# Altium PCB MetroBand 1.1 with changes - PCB1.PcbDoc
Units mm, origin at the board's own origin, x right, y up, seen from the top; angles counter-clockwise.
Board outline 38.5 x 42.5 mm, 2 copper layers (Top Layer, Bottom Layer); 50 components, 40 nets, 177 pads, 23 vias.
Unrouted connection lines stored in the file: 1.
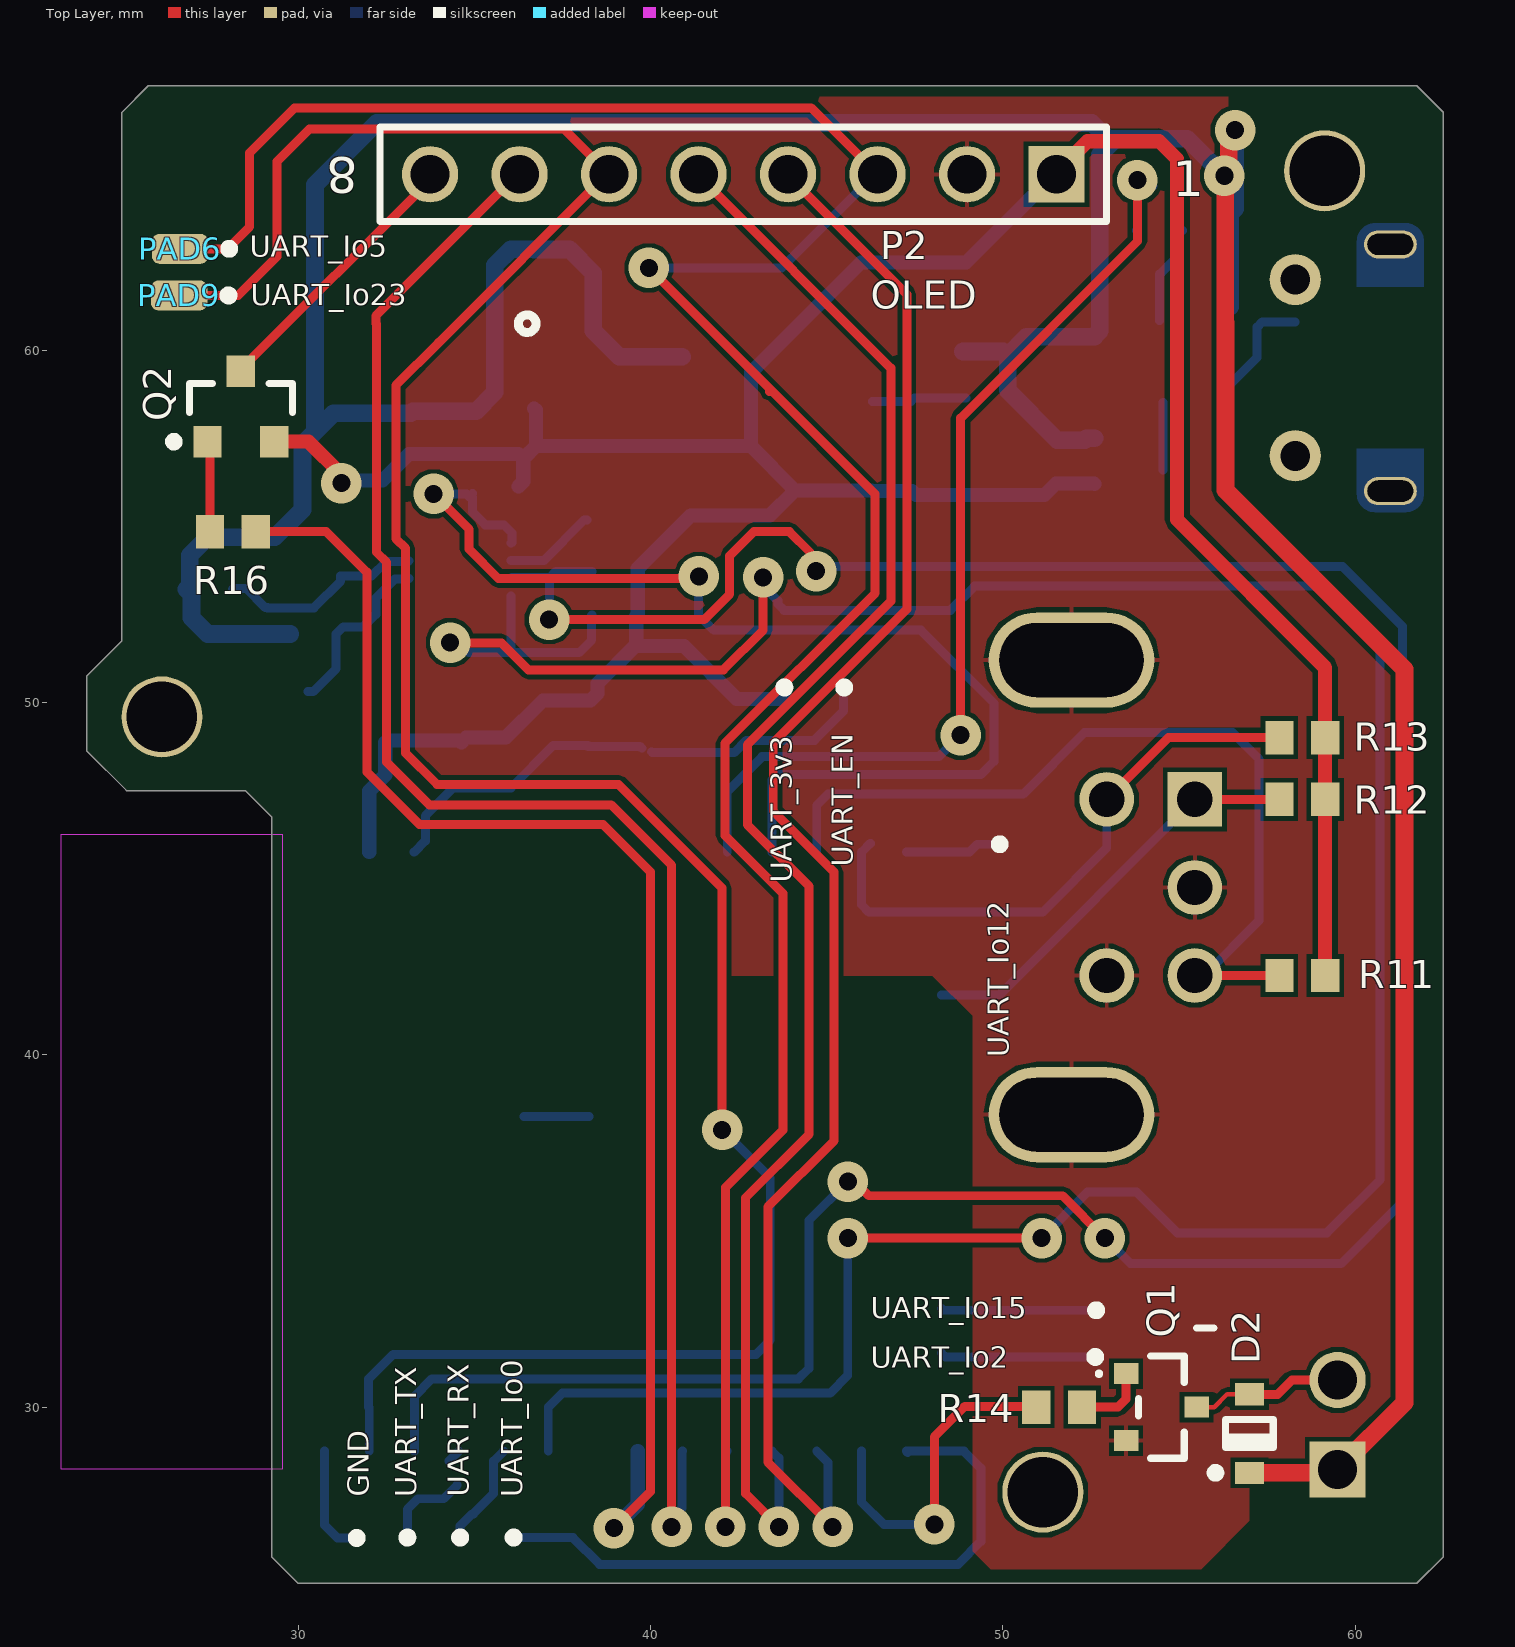
[diagram p0: Top Layer view]
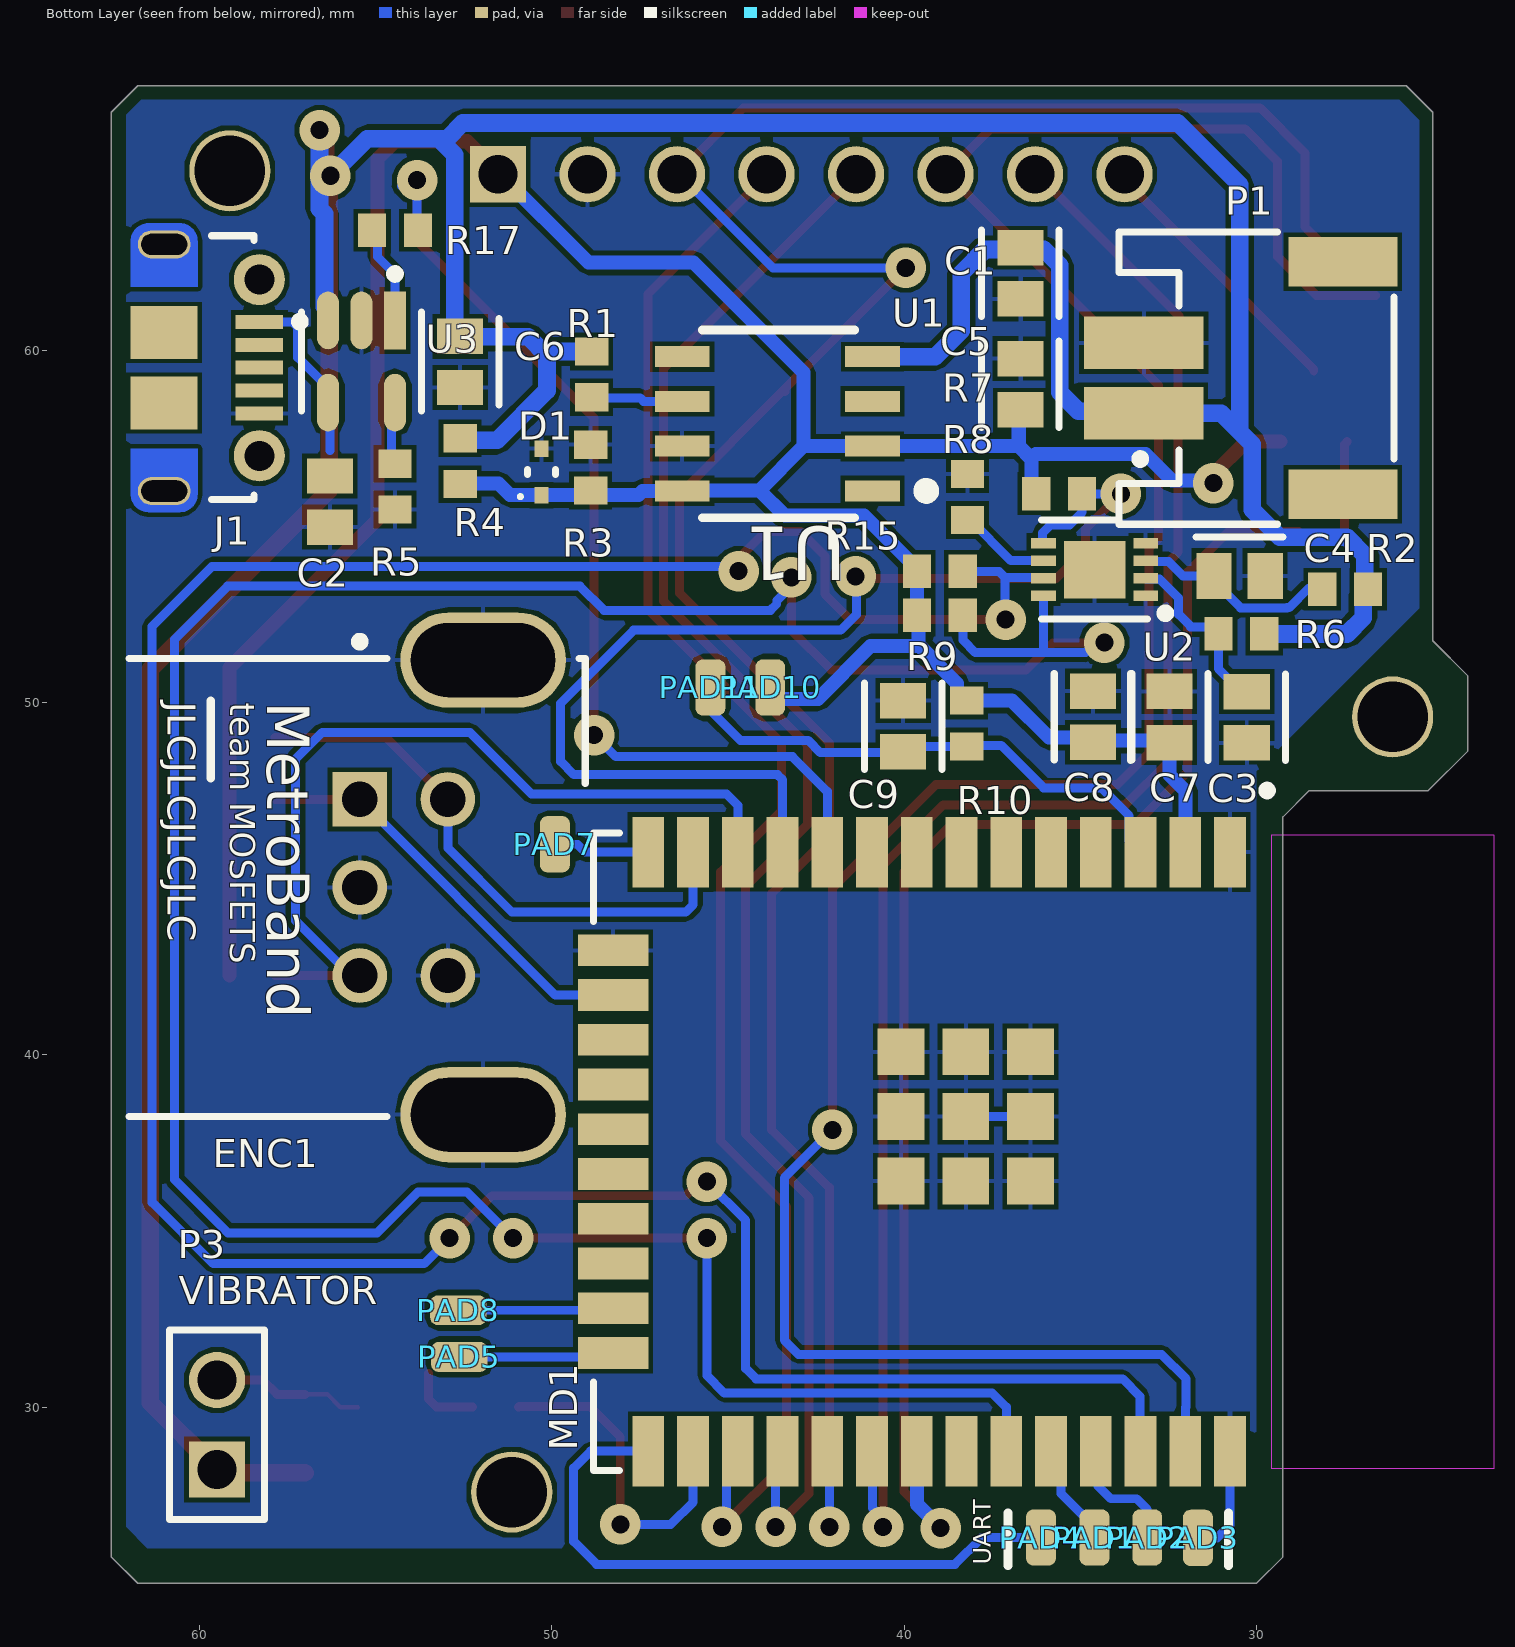
[diagram p1: Bottom Layer view, seen from below]
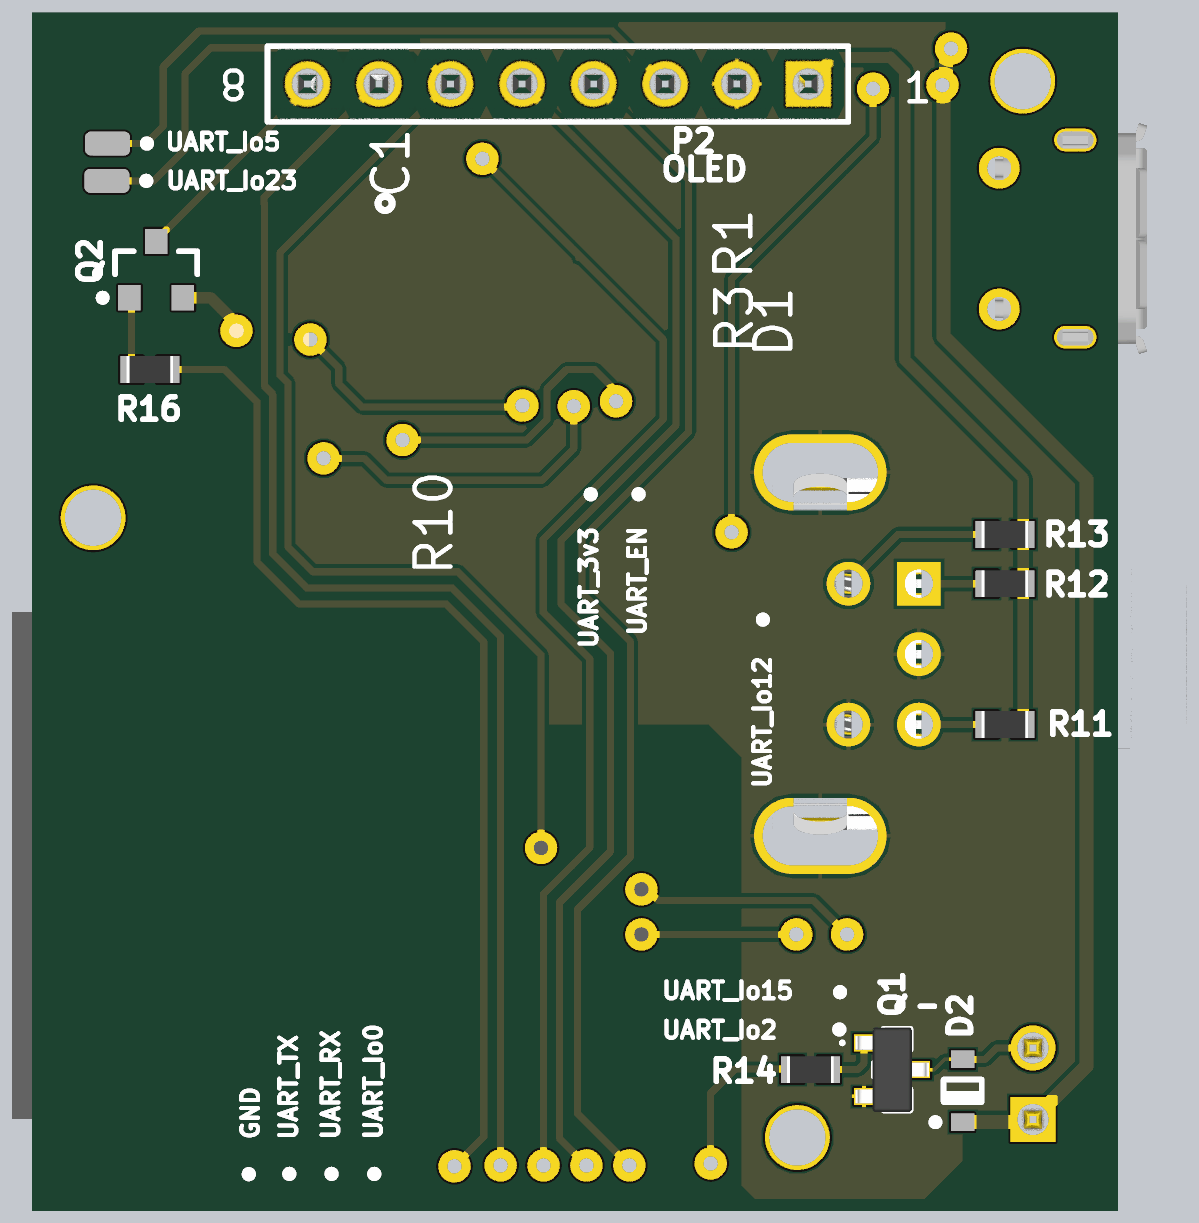
[diagram p2: 3D render of the assembled board from above, using the file's embedded part models]
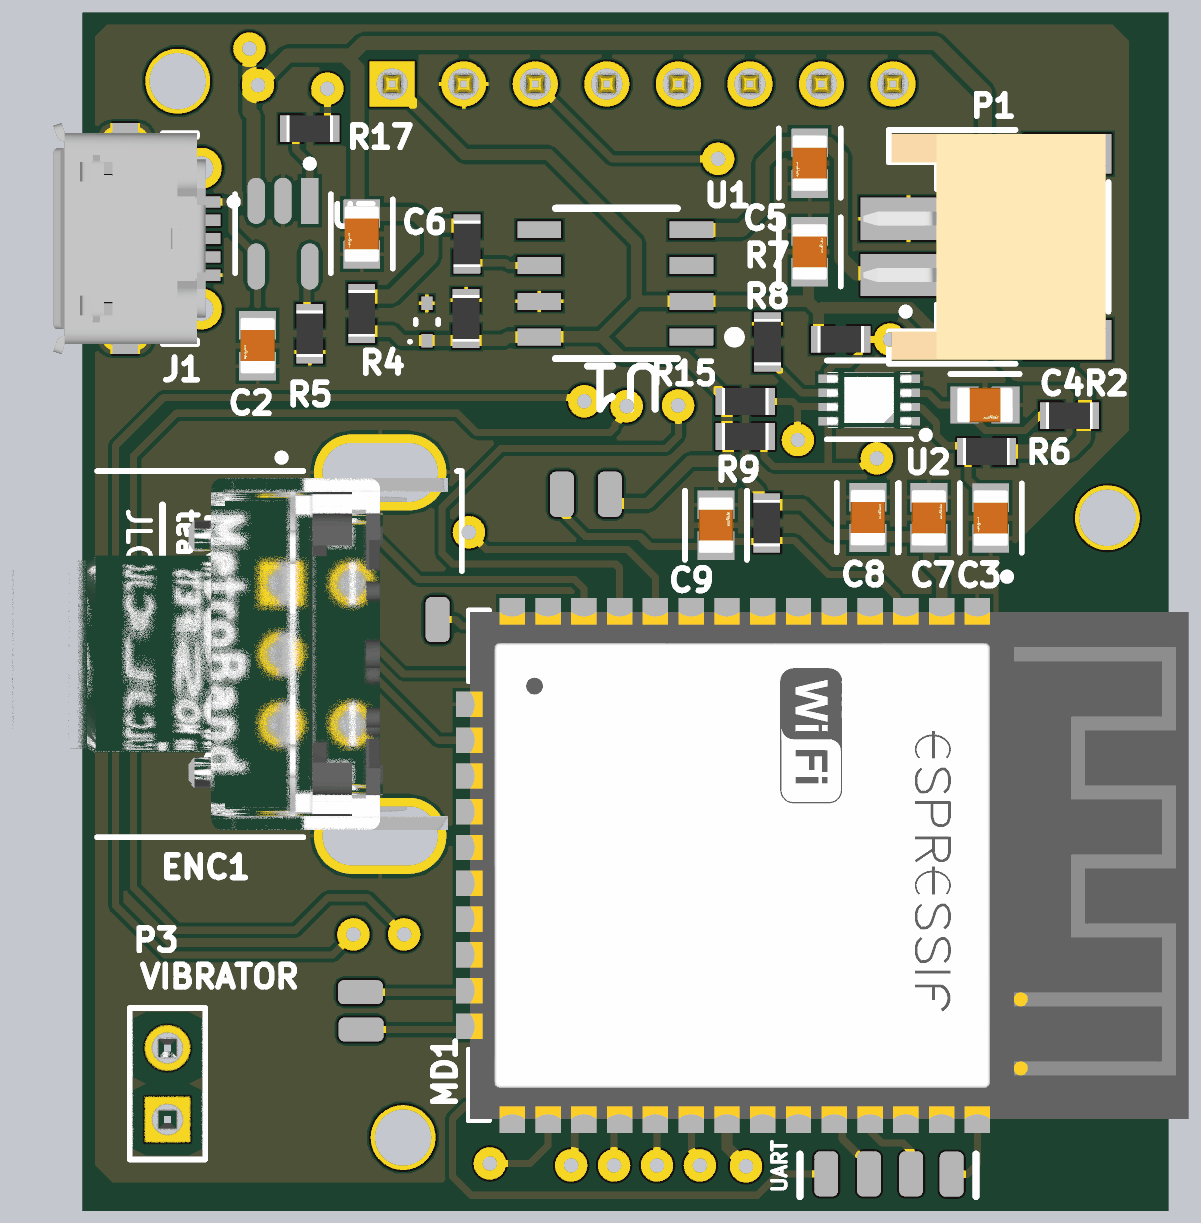
[diagram p3: 3D render of the assembled board from below, using the file's embedded part models]

## Layer stack, top to bottom
Top Solder: solder mask 0.0102, Solder Resist, Dk 3.5
Top Layer: signal copper 0.0356
Dielectric 1: dielectric 0.32, FR-4, Dk 4.8
Bottom Layer: signal copper 0.0356
Bottom Solder: solder mask 0.0102, Solder Resist, Dk 3.5

## Board outline
24,50.75 25,51.75 25,66.75 25.75,67.5 61.75,67.5 62.5,66.75 62.5,25.75 61.75,25 30,25 29.25,25.75 29.25,46.75 28.5,47.498 25.127,47.498 24,48.625

## Design rules (kind name [scope] priority, off if disabled: settings)
BoardOutlineClearance [All] p1: gap=0.2 ignorepadtopadclearanceinfootprint=FALSE
Clearance [All] p1: gap=0.127 ignorepadtopadclearanceinfootprint=FALSE except(0.25: Arc-Hole Track-Hole SMDPad-Hole THPad-Hole Via-Hole Fill-Hole Poly-Hole Region-Hole Text-Hole)
ComponentClearance [All] p1: gap=0.127 collisioncheckmode=3 verticalgap=0.127 showdistances=TRUE
DiffPairsRouting [All] p1: maxlimit=0.254 minlimit=0.127 mostfreqgap=0.127 toplayer_minwidth=0.127 toplayer_maxwidth=25.4 toplayer_prefwidth=0.127 bottomlayer_minwidth=0.127 bottomlayer_maxwidth=25.4 bottomlayer_prefwidth=0.127 maxuncoupledlength=12.7
Height [All] p1: minheight=0 maxheight=1816.048 prefheight=12.7
HoleSize [All] p1: absolutevalues=TRUE maxlimit=6.3 minlimit=0.3 maxpercent=80.000 minpercent=20.000
HoleToHoleClearance [All] p1: gap=0.25 allowstackedmicrovias=FALSE
MinimumAnnularRing [All] p1: minimumring=0.076
MinimumSolderMaskSliver [All] p1: minsoldermaskwidth=0
PlaneClearance [All] p1: clearance=0.127
PlaneConnect PlaneConnectPowerPads [InPadClass('PowerPads')] p1: planeconnectstyle=Direct reliefexpansion=0.508 reliefentries=4 reliefconductorwidth=0.254 reliefairgap=0.254
PlaneConnect [All] p2: pad.planeconnectstyle=Relief pad.reliefexpansion=0.3 pad.reliefentries=4 pad.reliefconductorwidth=0.127 pad.reliefairgap=0.127 via.planeconnectstyle=Direct via.reliefexpansion=0.3 via.reliefentries=4 via.reliefconductorwidth=0.127 via.reliefairgap=0.127
PolygonConnect PolygonConnectPowerPads [All vs (InPadClass('PowerPads'))] p1: connectstyle=Direct reliefconductorwidth=0.254 reliefentries=4 polygonreliefangle="90 Angle" airgapwidth=0.254
PolygonConnect [All] p2: thpad.connectstyle=Relief thpad.reliefconductorwidth=0.127 thpad.reliefentries=4 thpad.polygonreliefangle="90 Angle" thpad.airgapwidth=0.127 smdpad.connectstyle=Relief smdpad.reliefconductorwidth=0.127 smdpad.reliefentries=4 smdpad.polygonreliefangle="90 Angle" smdpad.airgapwidth=0.127 via.connectstyle=Direct via.reliefconductorwidth=0.127 via.reliefentries=4 via.polygonreliefangle="90 Angle" via.airgapwidth=0.127
RoutingVias [All] p1: holewidth=0.3 width=0.6 viastyle="Through Hole" minholewidth=0.3 minwidth=0.6 maxholewidth=0.6 maxwidth=6.6
SilkToSilkClearance [All] p1: silktosilkclearance=0
SilkToSolderMaskClearance [IsPad] p1: minsilkscreentomaskgap=0.127 clearancetoexposedcopper=TRUE
SolderMaskExpansion [All] p1: expansion=0.075 istentingtop=FALSE
Width [All] p1: maxlimit=25.4 minlimit=0.127 preferedwidth=0.127 minimp=50.000000 maximp=50.000000 favimp=50.000000
20 further rules are at their usual default settings.

## Classes and differential pairs
component class "Metroband 1.1 with changes - Sheet1": Q2 R16 R17

## Components (designator, comment, footprint, x,y, rotation, side; value= is the part's Value field where it differs from the comment)
C1 "1uF" FP-GRM21B-0_15-IPC_C 36.703,62.179 r270 bottom
C2 "4.7uF" FP-GRM21B-0_15-IPC_C 56.3,55.7 r270 bottom
C3 "1uF" FP-GRM21B-0_15-IPC_C 30.277,49.581 r270 bottom
C4 "10nF" FP-GRM21B-0_15-IPC_C 30.48,53.594 r180 bottom
C5 "1uF" FP-GRM21B-0_15-IPC_C 36.703,59.03 r90 bottom
C6 "4.7uF" FP-GRM21B-0_15-IPC_C 52.603,59.665 r270 bottom
C7 "10uF" FP-GRM21B-0_15-IPC_C 32.474,49.588 r90 bottom
C8 "100nF" FP-GRM21B-0_15-IPC_C 34.64,49.596 r90 bottom
C9 "1uF" FP-GRM21B-0_15-IPC_C 40.03,49.327 r90 bottom
D1 "MM5Z3V3T1G" ONSC-SOD-523-2-502-01_V 50.292,56.54 r90 bottom
D2 "BAT54HT1G" ONSC-SOD-323-2-477-02_V 57,29.25 r90 top
ENC1 "PEC12R-2120F-S0012" FP-PEC12R-2120F-S0012-MFG 60.75,44.75 r270 bottom
J1 "105017-0001" USB-MICRO-B_V 59.65,59.5 r270 bottom
MD1 "ESP32-WROOM-32D" FP-ESP32-WROOM-32D-MFG 36.01,37.25 r270 bottom
P1 "620102131822" 620102131822 29.997,59.207 r90 bottom
P2 "61300811121" 61300811121 42.635,64.989 r180 top
P3 "61300211121" 61300211121 59.5,29.5 r90 bottom
PAD1 "RX" PAD-Footprint-1#1 34.4,26.3 r180 bottom
PAD2 "TX" PAD-Footprint-1#2 33.782,26.289 r180 bottom
PAD3 "GND" PAD-Footprint-1#3 31.663,26.289 r180 bottom
PAD4 "IO0" PAD-Footprint-1#4 37.9,22.6 r90 top
PAD5 "IO2" PAD-Footprint-1#3 52.625,31.425 r90 bottom
PAD6 "IO5" PAD-Footprint-1#3 26.65,62.875 r90 top
PAD7 "IO12" PAD-Footprint-1#3 49.913,45.975 r0 bottom
PAD8 "IO15" PAD-Footprint-1#3 52.65,32.75 r90 bottom
PAD9 "IO23" PAD-Footprint-1#3 26.625,61.55 r90 top
PAD10 "3V3" PAD-Footprint-1#3 43.8,50.425 r180 bottom
PAD11 "EN" PAD-Footprint-1#3 45.5,50.425 r180 bottom
Q1 "BC847B215" NXP-SOT23-3_V 54.5,30 r0 top
Q2 "MMBT4403LT1G" ONSC-SOT-23-3-318-08_V 28.375,58.4 r90 top
R1 "100K" RESC1609X50X30NL8T20 48.87,59.309 r90 bottom
R2 "100" RESC1609X50X30NL8T20 27.483,53.213 r180 bottom
R3 "1K" RESC1609X50X30NL8T20 48.9,56.666 r270 bottom
R4 "3.3" RESC1609X50X30NL8T20 52.603,56.845 r270 bottom
R5 "2K" RESC1609X50X30NL8T20 54.45,56.125 r90 bottom
R6 "1K" RESC1609X50X30NL8T20 30.429,51.943 r180 bottom
R7 "2.2K" RESC1609X50X30NL8T20 38.202,55.829 r270 bottom
R8 "2.2K" RESC1609X50X30NL8T20 35.6,55.925 r0 bottom
R9 "2.2K" RESC1609X50X30NL8T20 38.989,52.476 r0 bottom
R10 "10K" RESC1609X50X30NL8T20 38.227,49.403 r90 bottom
R11 "2.2K" RESC1609X50X30NL8T20 58.5,42.25 r0 top
R12 "2.2K" RESC1609X50X30NL8T20 58.5,47.25 r0 top
R13 "2.2K" RESC1609X50X30NL8T20 58.5,49 r0 top
R14 "1K" RESC1609X50X30NL8T20 51.6,30 r180 top
R15 "2.2K" RESC1609X50X30NL8T20 38.989,53.721 r0 bottom
R16 "1K" RESC1609X50X30NL8T20 28.15,54.85 r0 top
R17 "470" RESC1609X50X30NL8T20 54.45,63.4 r180 bottom
U1 "AP7217A-33SPG-13" AP7217A-33SPG-13-Footprint-1 40.898,56.003 r90 bottom
U2 "MAX17043G+T" FP-T823-1-MFG 34.595,53.772 r0 bottom
U3 "MCP73831T-2ACI/OT" FP-C04-091-OT-IPC_A 55.4,59.675 r270 bottom

## Footprints (in the part's own frame and the unit in brackets; to place one, negate y for a bottom-side part, rotate by r counter-clockwise, add the part's x,y. Pads: shape width x height; smd on the part's side, far side on the other; paste and mask are expansions set on the pad)
61300211121 [mm] "Pin Header, pitch 2.54 mm, THT, Vertical, single row, 2p"
  rect 1.6x1.6 hole 1.1: 1(-1.27,0)
  round 1.6 hole 1.1: 2(1.27,0)
  silkscreen extent -2.69,-1.35 2.69,1.35, body extent -2.54,-1.27 2.54,1.27, height 8.57
61300811121 [mm] "Pin Header, pitch 2.54 mm, THT, Vertical, single row, 8p"
  rect 1.6x1.6 hole 1.1: 1(-8.89,0)
  round 1.6 hole 1.1: 2(-6.35,0) 3(-3.81,0) 4(-1.27,0) 5(1.27,0) 6(3.81,0) 7(6.35,0) 8(8.89,0)
  silkscreen extent -10.31,-1.35 10.31,1.35, body extent -10.16,-1.27 10.16,1.27, height 8.57
620102131822 [mm] "2.00mm SMT Male Horizontal Shrouded Header, 2p"
  rect 1.5x3.4 smd: 1(-1,3.2) 2(1,3.2)
  rect 1.4x3.1 smd: MP1(-3.3,-2.45) MP2(3.3,-2.45)
  silkscreen extent -4.15,-3.9 4.15,3.9, body extent -4,-3.8 4,4.8, height 5.57
AP7217A-33SPG-13-Footprint-1 [mm]
  rect 0.6x1.55 smd: 1(0,0) 2(1.27,0) 3(2.54,0) 4(3.81,0) 5(3.81,5.4) 6(2.54,5.4) 7(1.27,5.4) 8(0,5.4)
  silkscreen extent -0.76,-1.76 4.57,4.83
FP-C04-091-OT-IPC_A [mil]
  rect 64.5x24.33 smd paste+0 mask+0: 1(-45.91,37.4)
  rrect100% 64.5x24.33 smd paste+0 mask+0: 2(-45.91,0) 3(-45.91,-37.4) 4(45.91,-37.4) 5(45.91,37.4)
  silkscreen extent -103,-67 55,67
FP-ESP32-WROOM-32D-MFG [mm]
  rect 2x0.9 smd paste+0 mask+0: 1(-8.5,5.26) 2(-8.5,3.99) 3(-8.5,2.72) 4(-8.5,1.45) 5(-8.5,0.18) 6(-8.5,-1.09) 7(-8.5,-2.36) 8(-8.5,-3.63) 9(-8.5,-4.9) 10(-8.5,-6.17) 11(-8.5,-7.44) 12(-8.5,-8.71) 13(-8.5,-9.98) 14(-8.5,-11.25) 25(8.5,-11.25) 26(8.5,-9.98) 27(8.5,-8.71) 28(8.5,-7.44) 29(8.5,-6.17) 30(8.5,-4.9) 31(8.5,-3.63) 32(8.5,-2.36) 33(8.5,-1.09) 34(8.5,0.18) 35(8.5,1.45) 36(8.5,2.72) 37(8.5,3.99) 38(8.5,5.26)
  rect 0.9x2 smd paste+0 mask+0: 15(-5.715,-12.25) 16(-4.445,-12.25) 17(-3.175,-12.25) 18(-1.905,-12.25) 19(-0.635,-12.25) 20(0.635,-12.25) 21(1.905,-12.25) 22(3.175,-12.25) 23(4.445,-12.25) 24(5.715,-12.25)
  rect 1.33x1.33 smd paste+0 mask+0: 39(-2.835,-4.075) 39(-2.835,-2.24) 39(-2.835,-0.405) 39(-1,-4.075) 39(-1,-2.24) 39(-1,-0.405) 39(0.835,-4.075) 39(0.835,-2.24) 39(0.835,-0.405)
  Keep-Out Layer region: -9,12.75 9,12.75 9,6.45 -9,6.45
  Keep-Out Layer region: -9,12.75 9,12.75 9,6.45 -9,6.45
  silkscreen extent -10.37,-12.8 9.05,6.43, body extent -9,-12.75 9,12.75, height 3.2
FP-GRM21B-0_15-IPC_C [mm]
  rect 1.006x1.308 smd paste+0 mask+0: 1(-0.726,0) 2(0.726,0)
  silkscreen extent -1.23,-1.1 1.23,1.1, body extent -1,-0.63 1,0.63, height 1.4
FP-PEC12R-2120F-S0012-MFG [mm]
  round 1.55 hole 1 paste-1000 mask+0: 1(-2.5,7.8) 2(2.5,7.8) B(2.5,5.3) C(0,5.3)
  rrect100% 2.7x4.7 hole 2.1 slot 4.1 at 90 deg paste-1000 mask+0: 3(-6.45,8.8) 4(6.45,8.8)
  rect 1.55x1.55 hole 1 paste-1000 mask+0: A(-2.5,5.3)
  silkscreen extent -7.1,-1.25 6.5,11.7, body extent -6.41,-11.2 6.41,11.2, height 17.2
FP-T823-1-MFG [mm]
  rect 0.7x0.3 smd paste+0 mask+0: 1(-1.45,0.75) 2(-1.45,0.25) 3(-1.45,-0.25) 4(-1.45,-0.75) 5(1.45,-0.75) 6(1.45,-0.25) 7(1.45,0.25) 8(1.45,0.75)
  rect 1.75x1.63 smd paste+0 mask+0: 9(0,0)
  silkscreen extent -2.13,-1.4 1.5,1.4, body extent -1.5,-1 1.5,1, height 0.8
NXP-SOT23-3_V [mm] "SOT23, 3-Leads, Body 2.9x1.3mm, Pitch 0.95mm"
  rect 0.7x0.6 smd paste-0.05: 1(-1,0.95) 2(-1,-0.95) 3(1,0)
  silkscreen extent -1.79,-1.45 0.65,1.45, body extent -1.3,-1.5 1.3,1.5, height 1.1
ONSC-SOD-323-2-477-02_V [mm] "SOD, 2-Leads, Body 1.7x1.25mm"
  rect 0.63x0.83 smd: 1(-1.115,0) 2(1.115,0)
  silkscreen extent -1.24,-0.67 0.4,1.09, body extent -0.85,-0.63 0.85,0.63, height 1.06
ONSC-SOD-523-2-502-01_V [mm] "SOD, 2-Leads, Body 1.2x0.8mm"
  rect 0.48x0.4 smd: 1(-0.66,0) 2(0.66,0)
  silkscreen extent -0.75,-0.4 0.07,0.65, body extent -0.6,-0.4 0.6,0.4, height 0.7
ONSC-SOT-23-3-318-08_V [mm] "SOT23, 3-Leads, Body 2.92x1.3mm, Pitch 0.95mm"
  rect 0.9x0.8 smd: 1(-1,0.95) 2(-1,-0.95) 3(1,0)
  silkscreen extent -1.12,-1.46 0.65,2.02, body extent -0.65,-1.46 0.65,1.46, height 1.11
PAD-Footprint-1#1 [mm]
  rrect50% 0.85x1.6 smd: 1(-0.2,0)
PAD-Footprint-1#2 [mm]
  rrect50% 0.85x1.6 smd: 1(0.682,0.011)
PAD-Footprint-1#3 [mm]
  rrect50% 0.85x1.6 smd: 1(0,0)
PAD-Footprint-1#4 [mm]
  rrect50% 1.6x0.85 smd far side: 1(3.7,1.784)
RESC1609X50X30NL8T20 [mm] "Chip Resistor, 2-Leads, Body 1.65x0.95mm, IPC Medium Density"
  rect 0.8x0.95 smd: 1(-0.65,0) 2(0.65,0)
  body extent -0.82,-0.48 0.82,0.48, height 0.5
USB-MICRO-B_V [mm] "USB, MICRO B, Body 7.491x4.695 mm, Pitch 0.65 mm"
  rect 0.4x1.35 smd: 1(-1.3,1.35) 2(-0.65,1.35) 3(0,1.35) 4(0.65,1.35) 5(1.3,1.35)
  round 1.45 hole 0.85: 6(-2.5,1.35) 7(2.5,1.35)
  oval 0.8x1.5 hole 0.6 slot 1.3 at 90 deg: 8(-3.5,-1.35) 11(3.5,-1.35)
  rect 1.5x1.9 smd: 9(-1,-1.35) 10(1,-1.35)
  Top Layer circle w0.5: c-3.6,-1.8 r0.25
  Top Layer circle w0.5: c-3.6,-0.9 r0.25
  Top Layer circle w0.5: c3.6,-1.8 r0.25
  Top Layer circle w0.5: c3.6,-0.9 r0.25
  Top Layer region: -3.6,-1.8 -3.6,-0.9 -4.1,-0.9 -4.1,-1.8
  Top Layer region: 3.6,-0.9 3.6,-1.8 4.1,-1.8 4.1,-0.9
  Top Layer region: 2.3,-0.4 2.3,-2.3 3.6,-2.3 3.6,-0.4
  Top Layer region: -2.3,-2.3 -2.3,-0.4 -3.6,-0.4 -3.6,-2.3
  silkscreen extent -3.75,-0.01 3.75,2.62, body extent -4.1,-3.9 4.1,1.5, height 2.67

## Part data
C1 C5: library part CMP-2007-03541-2, "Chip Multilayer Ceramic Capacitors for General Purpose, 0805, 1uF, X5R, 15%, 10%, 25V", Case Code (Imperial)=0805, Case Code (Metric)=2012, Dielectric=X5R, Max Operating Temperature=85°C, Min Operating Temperature=-55°C, Package Quantity=1, Tolerance=10%, Voltage=25V, Capacitance=1uF, Case/Package=0805, Depth=1.25mm, Height=1.25mm, Lead Free="Lead Free", Length=2mm, Material=Ceramic, Mount="Surface Mount", Packaging="Tape and Reel", Radiation Hardening=No, Termination=SMD/SMT, Thickness=0.053inch, Voltage Rating=25V, Voltage Rating (DC)=25V, Width=0.049inch
C2 C6: library part CMP-2007-03541-2, "Chip Multilayer Ceramic Capacitors for General Purpose, 0805, 4.7uF, X5R, 15%, 10%, 25V", Capacitance=10uF, Case Code (Imperial)=0805, Case Code (Metric)=2012, Dielectric=X5R, Max Operating Temperature=85°C, Min Operating Temperature=-55°C, Package Quantity=1, Tolerance=10%, Voltage=25V, Case/Package=0805, Depth=1.25mm, Height=1.25mm, Lead Free="Lead Free", Length=2mm, Material=Ceramic, Mount="Surface Mount", Packaging="Tape and Reel", Radiation Hardening=No, Termination=SMD/SMT, Thickness=0.053inch, Voltage Rating=25V, Voltage Rating (DC)=25V, Width=0.049inch
C3 C9: library part CMP-2007-03541-2, "Chip Multilayer Ceramic Capacitors for General Purpose, 0805, 1uF, X5R, 15%, 10%, 25V", Capacitance=10uF, Case Code (Imperial)=0805, Case Code (Metric)=2012, Dielectric=X5R, Max Operating Temperature=85°C, Min Operating Temperature=-55°C, Package Quantity=1, Tolerance=10%, Voltage=25V, Case/Package=0805, Depth=1.25mm, Height=1.25mm, Lead Free="Lead Free", Length=2mm, Material=Ceramic, Mount="Surface Mount", Packaging="Tape and Reel", Radiation Hardening=No, Termination=SMD/SMT, Thickness=0.053inch, Voltage Rating=25V, Voltage Rating (DC)=25V, Width=0.049inch
C4: library part CMP-2007-03541-2, "Chip Multilayer Ceramic Capacitors for General Purpose, 0805, 10nF, X5R, 15%, 10%, 25V", Capacitance=10uF, Case Code (Imperial)=0805, Case Code (Metric)=2012, Dielectric=X5R, Max Operating Temperature=85°C, Min Operating Temperature=-55°C, Package Quantity=1, Tolerance=10%, Voltage=25V, Case/Package=0805, Depth=1.25mm, Height=1.25mm, Lead Free="Lead Free", Length=2mm, Material=Ceramic, Mount="Surface Mount", Packaging="Tape and Reel", Radiation Hardening=No, Termination=SMD/SMT, Thickness=0.053inch, Voltage Rating=25V, Voltage Rating (DC)=25V, Width=0.049inch
C7: library part CMP-2007-03541-2, "Chip Multilayer Ceramic Capacitors for General Purpose, 0805, 10uF, X5R, 15%, 10%, 25V", Case Code (Imperial)=0805, Case Code (Metric)=2012, Dielectric=X5R, Max Operating Temperature=85°C, Min Operating Temperature=-55°C, Package Quantity=1, Tolerance=10%, Voltage=25V, Capacitance=10uF, Case/Package=0805, Depth=1.25mm, Height=1.25mm, Lead Free="Lead Free", Length=2mm, Material=Ceramic, Mount="Surface Mount", Packaging="Tape and Reel", Radiation Hardening=No, Termination=SMD/SMT, Thickness=0.053inch, Voltage Rating=25V, Voltage Rating (DC)=25V, Width=0.049inch
C8: library part CMP-2007-03541-2, "Chip Multilayer Ceramic Capacitors for General Purpose, 0805, 100nF, X5R, 15%, 10%, 25V", Capacitance=10uF, Case Code (Imperial)=0805, Case Code (Metric)=2012, Dielectric=X5R, Max Operating Temperature=85°C, Min Operating Temperature=-55°C, Package Quantity=1, Tolerance=10%, Voltage=25V, Case/Package=0805, Depth=1.25mm, Height=1.25mm, Lead Free="Lead Free", Length=2mm, Material=Ceramic, Mount="Surface Mount", Packaging="Tape and Reel", Radiation Hardening=No, Termination=SMD/SMT, Thickness=0.053inch, Voltage Rating=25V, Voltage Rating (DC)=25V, Width=0.049inch
D1: library part CMP-1060-00750-1, "Zener Voltage Regulator, 500 mW, 2-Pin SOD-523, Pb-Free, Tape and Reel", Manufacturer="On Semiconductor", ComponentLink1Description="Manufacturer URL", ComponentLink1URL=http://www.onsemi.com/, ComponentLink2Description=Datasheet, ComponentLink2URL=http://www.onsemi.cn/pub_link/Collateral/MM5Z2V4T1-D.PDF, ComponentLink3Description="Package Specification", ComponentLink3URL=http://www.onsemi.com/pub_link/Collateral/502-01.PDF, DatasheetVersion="Rev. 10", Mounting Technology="Surface Mount", P Max (W)=0.5, PackageDescription="2-Pin SOD, Body 1.2 x 0.8 mm", PackageReference=SOD-523-2-502-01, PackageVersion="Rev. E, 09/2010", Packing="Tape and Reel", PartNumber=MM5Z3V3T1G, RoHS=Pb-Free, VZ Typ (V)=3.3
D2: library part CMP-1055-00462-1, "Schottky Barrier Diode, 2-Pin SOD-323, Pb-Free, Tape and Reel", Manufacturer="On Semiconductor", ComponentLink1Description="Manufacturer URL", ComponentLink1URL=http://www.onsemi.com/, ComponentLink2Description=Datasheet, ComponentLink2URL=http://www.onsemi.cn/pub_link/Collateral/BAT54HT1-D.PDF, ComponentLink3Description="Package Specification", ComponentLink3URL=http://www.onsemi.com/pub_link/Collateral/477-02.PDF.1, Configuration=Single, DatasheetVersion="Rev. 6", IFSM Max (A)=0.6, Mounting Technology="Surface Mount", PackageDescription="2-Pin SOD, Body 1.7 x 1.25 mm", PackageReference=SOD-323-2-477-02, PackageVersion="Rev. H, 03/2007", Packing="Tape and Reel", PartNumber=BAT54HT1G, RoHS=TRUE, trr Max (ns)=5
ENC1: library part CMP-07421-000025-1, "ROTARY ENCODER MECHANICAL 12PPR", Max Operating Temperature=70°C, Min Operating Temperature=-30°C, Package Quantity=75, Built in Switch=Yes, Detent=Yes, Encoder Type=Mechanical, Height=13.4mm, Hole Diameter=2.1mm, Length=26mm, Mount="Through Hole", Number of Channels=2, Orientation="Right Angle", Output Type=Quadrature, Packaging=Bulk, Pulses per Revolution=12, RoHS Compliant=Yes, Series=PEC12R, Termination="PC Pin", Width=12.5mm
J1: library part CMP-2000-05827-1, "Micro-USB B Receptacle, Right Angle, Bottom Mount, Surface Mount, with Solder Tabs, -30 to 85 degC, 5-Pin USB, RoHS, Tape and Reel", Manufacturer=Molex, Package Description="5-Leads USB, Micro B, Body 7.5 x 5 mm, Pitch 0.65 mm", Package Reference=MICRO-B, Package Version="Rev. F, 12/2012", Standard Package=1, Voltage - Max=30V, 3D Model=105017-0001.stp, Catalog Drawings=1050170001, Category=Connectors,Interconnects, Circuits=5, Connector Type=USB-microB, Datasheet URL=http://www.molex.com/elqNow/elqRedir.htm?ref=http://www.molex.com/webdocs/datasheets/pdf/en-us/1050170001_IO_CONNECTORS.pdf, Datasheet Version=03/2016, Family=USB,DVI,HDMIConnectors, Featured Product=Micro-USBConnectorsUSBConnectors, Features=Shielded,SolderRetention, Gender=Receptacle, Ingress Protection=-, Manufacturer URL=http://www.molex.com/, Mating Products=WM17145-ND-CABLEMICROUSBBTOSTDA1.0MWM17147-ND-CABLEMICROUSBBTOSTDA2.0MWM17146-ND-CABLEMICROUSBBTOSTDA1.5M, Mounting Technology=SurfaceMount, Mounting Type=BoardCutout,SurfaceMount,RightAngle, Number of Contacts=5, Online Catalog=Molex-MicroUSB, Other Names=WM1399DKR, Package URL=http://www.molex.com/pdm_docs/sd/1050170001_sd.pdf, Packaging=Digi-Reel®, PCN Assembly/Origin=ResinSupplier21/Oct/2015, RoHS Information=1050170001CertofCompliance, Series=-, Specifications=-
MD1: library part CMP-194065-000003-1, "WIFI MODULE 32MBITS SPI FLASH", Manufacturer="Espressif Systems", Max Frequency=2484MHz, Max Supply Voltage=3.6V, Min Supply Voltage=3V, Nominal Supply Current=500mA, Temperature="-40°C to +85°C", Temperature Range High=+85°C, Temperature Range Low=-40°C, Automotive=No, Bandwidth=72MHz, Category=UNK, ComponentLink2Description=Datasheet, ComponentLink2URL=https://www.espressif.com/sites/default/files/documentation/esp32-wroom-32d_esp32-wroom-32u_datasheet_en.pdf, Data Rate=150Mbits/s, Device Class L1="Integrated Circuits (ICs)", Device Class L2="RF Semiconductors and Devices", Device Class L3=Transceivers, Digikey Description="WIFI MODULE 32MBITS SPI FLASH", Height=3.2mm, Interface=I2C,SPI,UART,Ethernet,I2S,Other, Lead Free=Yes, Manufacturer Part Number=ESP32-WROOM-32D, Mouser Description="Wi-Fi/BT BLE Module ESP32-D0WD, SPI Flash, UART, P", Number Of Adc Channels=16, Number Of Gpio=32, Octopart=https://octopart.com/esp32-wroom-32d-espressif+systems-91040050, Package=ESP32-WROOM-32D, RoHS=TRUE, Sensitivity=-98dBm
P1: library part CMP-1502-00669-1, "Male Shrouded Header WR-WTB, SMT, Right Angled, pitch 2 mm, 1 x 2 position", Contact Resistance=20mOhm, Manufacturer="Wurth Elektronik", Operating Temperature=-25to85degC, Working Voltage=100VAC, Datasheet URL=https://katalog.we-online.de/em/datasheet/6201xx131822.pdf, Gender=Male, Manufacturer URL=http://www.we-online.de, Mounting Technology=SMT, Orientation=RightAngled, Package Reference=620102131822, Packaging=TapeandReel, Part Number=620102131822, Pitch=2mm, Position=1x2, Publisher=WurthElektronik
P2: library part CMP-1502-01076-1, "THT Vertical Pin Header WR-PHD, Pitch 2.54 mm, Single Row, 8 pins", Contact Resistance=20mOhm, Manufacturer="Wurth Elektronik", Operating Temperature=-40to105degC, Rated Current=3A, Withstanding Voltage=500VAC, Working Voltage=250VAC, Datasheet URL=https://katalog.we-online.de/em/datasheet/6130xx11121.pdf, Gender=Male, Manufacturer URL=http://www.we-online.de, Mounting Technology=THT, Orientation=Vertical, Package Reference=61300811121, Packaging=Bag, Part Number=61300811121, Pin Number=8, Pitch=2.54mm, Publisher=WurthElektronik, Row Number=Single
P3: library part CMP-1712-00002-4, "THT Vertical Pin Header WR-PHD, Pitch 2.54 mm, Single Row, 2 pins", Contact Resistance=20mOhm, Manufacturer="Wurth Elektronik", Operating Temperature=-40to105degC, Rated Current=3A, Withstanding Voltage=500VAC, Working Voltage=250VAC, Datasheet URL=https://katalog.we-online.de/em/datasheet/6130xx11121.pdf, Gender=Male, Manufacturer URL=http://www.we-online.de, Mounting Technology=THT, Orientation=Vertical, Package Reference=61300211121, Packaging=Bag, Part Number=61300211121, Pin Number=2, Pitch=2.54mm, Publisher=WurthElektronik, Row Number=Single
PAD1 PAD2 PAD3 PAD4 PAD5 PAD6 PAD7 PAD8 PAD9 PAD10 PAD11: library part CMP-00000-3, "Wirepad"
Q1: library part CMP-013-00034-1, "TRANSISTOR, NPN, REEL 3K"
Q2: library part CMP-1048-00539-1, "Switching Transistor, PNP Silicon, 3-Pin SOT-23, Pb-Free, Tape and Reel", Manufacturer="On Semiconductor", ComponentLink1Description="Manufacturer URL", ComponentLink1URL=http://www.onsemi.com/, ComponentLink2Description=Datasheet, ComponentLink2URL=http://www.onsemi.cn/pub_link/Collateral/MMBT4403LT1-D.PDF, ComponentLink3Description="Package Specification", ComponentLink3URL=http://www.onsemi.cn/pub_link/Collateral/318-08.PDF, DatasheetVersion="Rev. 12", fT Min (MHz)=200, IC Continuous (A)=-0.6, Mounting Technology="Surface Mount", PackageDescription="3-Pin Small Outline Transistor, Body 2.92 x 1.3 mm, Pitch 0.95 mm", PackageReference=SOT-23-3-318-08, PackageVersion="Rev. AP, 11/2009", Packing="Tape and Reel", PartNumber=MMBT4403LT1G, Polarity=PNP, RoHS=TRUE
R1: library part CMP-2000-03816-5, "Chip Resistor, 100K Ohm, Jumper, 100 mW, -55 to 155 degC, 0603 (1608 Metric), RoHS, Tape and Reel", Manufacturer="Vishay Semiconductor", Max Operating Temperature="155 degC", Min Operating Temperature="-55 degC", Package Quantity=5000, Voltage Rating="75 V", ComponentLink1Description="Manufacturer URL", ComponentLink1URL=http://www.vishay.com/, ComponentLink2Description=Datasheet, ComponentLink2URL=http://www.vishay.com/docs/20035/dcrcwe3.pdf, DatasheetVersion=06/2012, Height="0.45 mm", Length="1.55 mm", Mount="Surface Mount", Mounting Technology="Surface Mount", PackageDescription="2-Pin Surface Mount Device, Body 1.575 x 0.85 mm", PackageReference=0603, Packaging="Tape and Reel", Pins=2, REACH SVHC=Unknown, RoHSCompliant=true
R2: library part CMP-2000-03816-5, "Chip Resistor, 100 Ohm, Jumper, 100 mW, -55 to 155 degC, 0603 (1608 Metric), RoHS, Tape and Reel", Manufacturer="Vishay Semiconductor", Max Operating Temperature="155 degC", Min Operating Temperature="-55 degC", Package Quantity=5000, Voltage Rating="75 V", ComponentLink1Description="Manufacturer URL", ComponentLink1URL=http://www.vishay.com/, ComponentLink2Description=Datasheet, ComponentLink2URL=http://www.vishay.com/docs/20035/dcrcwe3.pdf, DatasheetVersion=06/2012, Height="0.45 mm", Length="1.55 mm", Mount="Surface Mount", Mounting Technology="Surface Mount", PackageDescription="2-Pin Surface Mount Device, Body 1.575 x 0.85 mm", PackageReference=0603, Packaging="Tape and Reel", Pins=2, REACH SVHC=Unknown, RoHSCompliant=true
R3 R6 R14 R16: library part CMP-2000-03816-5, "Chip Resistor, 1K Ohm, Jumper, 100 mW, -55 to 155 degC, 0603 (1608 Metric), RoHS, Tape and Reel", Manufacturer="Vishay Semiconductor", Max Operating Temperature="155 degC", Min Operating Temperature="-55 degC", Package Quantity=5000, Voltage Rating="75 V", ComponentLink1Description="Manufacturer URL", ComponentLink1URL=http://www.vishay.com/, ComponentLink2Description=Datasheet, ComponentLink2URL=http://www.vishay.com/docs/20035/dcrcwe3.pdf, DatasheetVersion=06/2012, Height="0.45 mm", Length="1.55 mm", Mount="Surface Mount", Mounting Technology="Surface Mount", PackageDescription="2-Pin Surface Mount Device, Body 1.575 x 0.85 mm", PackageReference=0603, Packaging="Tape and Reel", Pins=2, REACH SVHC=Unknown, RoHSCompliant=true
R4: library part CMP-2000-03816-5, "Chip Resistor, 3.3 Ohm, Jumper, 100 mW, -55 to 155 degC, 0603 (1608 Metric), RoHS, Tape and Reel", Manufacturer="Vishay Semiconductor", Max Operating Temperature="155 degC", Min Operating Temperature="-55 degC", Package Quantity=5000, Voltage Rating="75 V", ComponentLink1Description="Manufacturer URL", ComponentLink1URL=http://www.vishay.com/, ComponentLink2Description=Datasheet, ComponentLink2URL=http://www.vishay.com/docs/20035/dcrcwe3.pdf, DatasheetVersion=06/2012, Height="0.45 mm", Length="1.55 mm", Mount="Surface Mount", Mounting Technology="Surface Mount", PackageDescription="2-Pin Surface Mount Device, Body 1.575 x 0.85 mm", PackageReference=0603, Packaging="Tape and Reel", Pins=2, REACH SVHC=Unknown, RoHSCompliant=true
R5 R17: library part CMP-2000-03816-5, "Chip Resistor, 2K Ohm, Jumper, 100 mW, -55 to 155 degC, 0603 (1608 Metric), RoHS, Tape and Reel", Manufacturer="Vishay Semiconductor", Max Operating Temperature="155 degC", Min Operating Temperature="-55 degC", Package Quantity=5000, Voltage Rating="75 V", ComponentLink1Description="Manufacturer URL", ComponentLink1URL=http://www.vishay.com/, ComponentLink2Description=Datasheet, ComponentLink2URL=http://www.vishay.com/docs/20035/dcrcwe3.pdf, DatasheetVersion=06/2012, Height="0.45 mm", Length="1.55 mm", Mount="Surface Mount", Mounting Technology="Surface Mount", PackageDescription="2-Pin Surface Mount Device, Body 1.575 x 0.85 mm", PackageReference=0603, Packaging="Tape and Reel", Pins=2, REACH SVHC=Unknown, RoHSCompliant=true
R7: library part CMP-2000-03816-5, "Chip Resistor, 0 Ohm, Jumper, 100 mW, -55 to 155 degC, 0603 (1608 Metric), RoHS, Tape and Reel", Manufacturer="Vishay Semiconductor", Max Operating Temperature="155 degC", Min Operating Temperature="-55 degC", Package Quantity=5000, Voltage Rating="75 V", ComponentLink1Description="Manufacturer URL", ComponentLink1URL=http://www.vishay.com/, ComponentLink2Description=Datasheet, ComponentLink2URL=http://www.vishay.com/docs/20035/dcrcwe3.pdf, DatasheetVersion=06/2012, Height="0.45 mm", Length="1.55 mm", Mount="Surface Mount", Mounting Technology="Surface Mount", PackageDescription="2-Pin Surface Mount Device, Body 1.575 x 0.85 mm", PackageReference=0603, Packaging="Tape and Reel", Pins=2, REACH SVHC=Unknown, RoHSCompliant=true
R8 R9 R11 R12 R13 R15: library part CMP-2000-03816-5, "Chip Resistor, 2.2K Ohm, Jumper, 100 mW, -55 to 155 degC, 0603 (1608 Metric), RoHS, Tape and Reel", Manufacturer="Vishay Semiconductor", Max Operating Temperature="155 degC", Min Operating Temperature="-55 degC", Package Quantity=5000, Voltage Rating="75 V", ComponentLink1Description="Manufacturer URL", ComponentLink1URL=http://www.vishay.com/, ComponentLink2Description=Datasheet, ComponentLink2URL=http://www.vishay.com/docs/20035/dcrcwe3.pdf, DatasheetVersion=06/2012, Height="0.45 mm", Length="1.55 mm", Mount="Surface Mount", Mounting Technology="Surface Mount", PackageDescription="2-Pin Surface Mount Device, Body 1.575 x 0.85 mm", PackageReference=0603, Packaging="Tape and Reel", Pins=2, REACH SVHC=Unknown, RoHSCompliant=true
R10: library part CMP-2000-03816-5, "Chip Resistor, 10K Ohm, Jumper, 100 mW, -55 to 155 degC, 0603 (1608 Metric), RoHS, Tape and Reel", Manufacturer="Vishay Semiconductor", Max Operating Temperature="155 degC", Min Operating Temperature="-55 degC", Package Quantity=5000, Voltage Rating="75 V", ComponentLink1Description="Manufacturer URL", ComponentLink1URL=http://www.vishay.com/, ComponentLink2Description=Datasheet, ComponentLink2URL=http://www.vishay.com/docs/20035/dcrcwe3.pdf, DatasheetVersion=06/2012, Height="0.45 mm", Length="1.55 mm", Mount="Surface Mount", Mounting Technology="Surface Mount", PackageDescription="2-Pin Surface Mount Device, Body 1.575 x 0.85 mm", PackageReference=0603, Packaging="Tape and Reel", Pins=2, REACH SVHC=Unknown, RoHSCompliant=true
U1: library part CMP-019-00049-2, "Fixed Positive LDO Regulator, 3.3V, 0.9V Dropout, CMOS, PDSO8"
U2: library part CMP-05715-000066-1, "IC 2-WIRE FG MODEL GAUGE LO BATT", Manufacturer=Maxim, Max Supply Voltage=4.5V, Min Supply Voltage=2.5V, Nominal Supply Current=50uA, Package=T823-1, Temperature="-20°C to +70°C", Temperature Range High=+70°C, Temperature Range Low=-20°C, Automotive=No, Category=IC, ComponentLink2Description=Datasheet, ComponentLink2URL=https://datasheets.maximintegrated.com/en/ds/MAX17043-MAX17044.pdf, Device Class L1="Integrated Circuits (ICs)", Device Class L2="Power Management ICs", Device Class L3="Battery Management", Digikey Description="IC 2-WIRE FG MODEL GAUGE LO BATT", Footprint Url=https://pdfserv.maximintegrated.com/land_patterns/90-0091.PDF, Height=0.8mm, Lead Free=Yes, Manufacturer Part Number=MAX17043G+T, Mouser Description="Battery Management Over Volt Protector Ideal Diode", Number of Cells=1, Octopart=https://octopart.com/max17043g%2Bt-maxim+integrated-43979038, RoHS=TRUE, Standoff Height=0mm
U3: library part CMP-0133-00143-2, "IC CONTROLLR LI-ION 4.2V SOT23-5", Case/Package=SOT-23, Drain to Source Resistance=350mR, Max Charge Current=500mA, Max Input Voltage=6V, Max Operating Temperature=85°C, Max Output Voltage=4.5V, Max Power Dissipation=1.54W, Min Operating Temperature=-40°C, Min Output Voltage=4.168V, Min Supply Voltage=3.75V, Output Voltage=4.2V, Voltage Rating=4.534V, Contact Plating=Tin, Height=0.051inch, Lead Free="Lead Free", Length=0.122inch, Max Supply Voltage=6V, Mount="Surface Mount", Number of Cells=1, Number of Channels=1, Number of Outputs=1, Number of Pins=5, Output Current=500mA, Packaging="Tape and Reel", Radiation Hardening=No, REACH SVHC="No SVHC", Termination=SMD/SMT, Weight=0.00709oz, Width=0.071inch

## Free pads (board coordinates)
  round 2.3 hole 2: ""(26.136,49.589) ""(51.136,27.589) ""(59.136,65.089)

## Via types
v1: diameter 1.15, hole 0.511, Top Layer to Bottom Layer, 23 vias

## Nets (pads, with @x,y where several pads share a name; then routed paths per layer and width w, separated by ;. In a path a pad name is that pad's centre, name@x,y a point inside that pad or via, vN(x,y) a via of type N, cw(c..) or ccw(c..) an arc to the next point about the centre after c; other vN are vias at no path point)
+3V3: C5.1 C7.1 C8.1 D1.1 MD1.2 P2.1 PAD10.1 Q2.2 R3.2 R4.2 R8.2 R9.2 R10.2 R11.2 R12.2 R13.2 R15.2 U1.2 U1.8 | length 93
  Top Layer w0.4: Q2.2 30.3,57.4 31.25,56.45 v1@31.275,56.45 ; P2.1@51.475,65 52.402,65.927 54.419,65.927 54.431,65.939 54.946,65.425 54.946,55.188 59.15,50.984 R13.2 R12.2 R11.2
  Bottom Layer w0.4: v1(31.225,56.225) 31.3,56.3 32.4,56.3 33.15,57.05 36.258,57.05 36.391,56.917 ; MD1.2 32.02,47.488 32.474,47.942 C7.1 ; C7.1@32.588,48.919 34.591,48.919 C8.1 34.77,49 35.894,49 36.947,50.053 R10.2 38.302,50.053 38.502,50.253 38.502,50.542 39.596,51.636 ; R8.2@36.25,56.134 36.391,56.275 36.391,56.917 ; C5.1@36.7,58.345 36.747,58.298 36.747,57.273 ; PAD10.1@43.825,50.1 42.45,50.1 40.95,51.6 39.632,51.6 39.596,51.636 ; U1.8@46.282,56.019 44.106,56.019 ; U1.8 47.424,56.003 47.535,55.892 48.297,55.892 ; 48.308,55.883 51.184,55.883 51.511,56.21 52.588,56.21 R4.2 ; P2.1@51.475,65 48.959,62.484 45.974,62.484 42.852,59.362 42.852,57.273 ; 36.391,56.917 36.747,57.273 ; 36.747,57.273 U1.2 42.852,57.273 ; 39.596,51.636 39.596,52.434 R9.2 39.639,53.796 41.143,55.3 43.387,55.3 44.106,56.019 ; 42.852,57.273 44.106,56.019
+3V7: C1.1 C6.1 D2.1 P1.1 P3.1 R1.2 R2.2 R4.1 R6.2 U1.4 U3.3 | length 124.6
  Top Layer w0.5: v1(56.591,66.243) 56.591,66.067 56.411,65.887 56.411,65.072 56.318,64.979 56.318,60.782 56.32,60.78 56.32,56.02 61.4,50.94 61.4,30.13 P3.1 59.405,28.135 D2.1
  Bottom Layer w0.5: R6.2 27.432,51.943 26.975,52.4 26.975,53.071 R2.2 26.924,53.304 26.924,54.178 27.432,54.686 29.337,54.686 30.124,55.474 30.124,57.328 30.48,57.683 ; U1.4 39.116,59.813 38.379,60.55 38.379,62.179 37.704,62.854 36.703,62.854 36.692,62.865 36.043,62.865 35.585,62.408 35.585,58.801 35.052,58.268 33.258,58.268 P1.1 31.004,58.207 30.48,57.683 ; R1.2 50.017,59.959 50.137,59.839 ; R4.1 52.375,57.495 52.321,57.442 51.549,57.442 50.137,58.854 50.137,59.839 ; C6.1@52.603,60.374 50.673,60.374 50.137,59.839 ; C6.1 52.756,60.543 52.756,65.547 53.21,66.001 ; v1(56.286,64.948) 55.233,66.001 53.21,66.001 ; U3.3@56.45,61.225 56.45,63.866 56.591,64.007 v1(56.591,66.243) ; 30.48,57.683 30.48,64.694 32.233,66.446 52.527,66.446 52.972,66.001 53.21,66.001
ALT: MD1.11 R8.1 U2.5 | length 32.9
  Top Layer w0.254: v1(33.849,55.918) 34.854,54.913 34.854,54.351 35.687,53.518 41.318,53.518 v1(41.375,53.575)
  Bottom Layer w0.254: v1(33.849,55.918) 34.774,55.918 34.859,55.834 R8.1 ; R8.1@34.95,55.834 34.95,55.397 35.306,55.042 35.839,55.042 36.068,54.813 36.068,54.545 U2.5 ; v1(41.375,53.575) 41.358,53.558 41.358,52.492 41.8,52.05 47.675,52.05 49.75,49.975 49.75,48.325 49.375,47.95 43.599,47.95 43.45,47.801 MD1.11
CHG_STAT: MD1.10 R17.2 | length 28.8
  Top Layer w0.254: v1(48.8,49.075) 48.8,58.071 53.823,63.094 v1(53.823,64.821)
  Bottom Layer w0.254: MD1.10 42.18,47.468 43.172,48.46 48.185,48.46 v1(48.8,49.075) ; R17.2 53.823,63.423 v1(53.823,64.821) 53.994,64.649 v1@54.266,64.649
EN_CLK: ENC1.A MD1.16 R12.1 | length 11.9
  Top Layer w0.254: ENC1.A R12.1
  Bottom Layer w0.254: MD1.16 49.895,41.695 ENC1.A
EN_DT: ENC1.B MD1.12 R11.1 | length 24.5
  Top Layer w0.254: ENC1.B R11.1
  Bottom Layer w0.254: MD1.12 44.72,47.082 45.038,47.4 50.575,47.4 52.324,49.149 56.515,49.149 57.277,48.387 57.277,43.815 55.712,42.25 ENC1.B
EN_SW: ENC1.1 MD1.13 R13.1 | length 16.7
  Top Layer w0.254: ENC1.1 54.7,49 R13.1
  Bottom Layer w0.254: MD1.13@46.242,46.002 MD1.13 45.99,44.26 46.2,44.05 51.129,44.05 52.95,45.871 ENC1.1
GND: C1.2 C2.2 C3.2 C4.2 C5.2 C6.2 C7.2 C8.2 C9.2 D1.2 ENC1.2 ENC1.3 ENC1.4 ENC1.C J1.5 MD1.1 MD1.15 MD1.38 MD1.39 P1.2 P2.2 PAD3.1 Q1.2 R3.1 R5.1 R7.1 U1.7 U2.1 U2.4 U2.9 U3.2 | length 5
  Bottom Layer w0.254: MD1.38 30.75,26.654 31.115,26.289 PAD3.1 ; MD1.39@36.415,38.25 MD1.39@38.25,38.25
NetC2_1: C2.1 J1.1 U3.4 | length 5
  Bottom Layer w0.254: 56.3,57.151 U3.4@56.3,58.509 ; U3.4 56.35,58.925 57.216,59.791 57.216,60.651 57.365,60.8 J1.1
NetC3_1: C3.1 R6.1 U2.2 | length 5.1
  Bottom Layer w0.254: C3.1 30.428,50.307 31.079,50.958 R6.1 31.282,52.146 31.877,52.146 31.877,52.172 32.207,52.502 32.207,52.959 32.747,53.499 33.122,53.499 U2.2
NetC4_1: C4.1 R2.1 U2.3 | length 5.9
  Bottom Layer w0.254: R2.1 28.158,53.238 28.524,53.238 29.07,52.693 29.129,52.693 29.136,52.686 30.449,52.686 31.206,53.443 C4.1 32.09,53.594 32.495,53.999 33.122,53.999 U2.3
NetD2_2: D2.2 P3.2 Q1.3 | length 4.3
  Top Layer w0.127: Q1.3 56,30 56.365,30.365 D2.2
  Top Layer w0.254: D2.2 57.797,30.365 58.202,30.77 P3.2
NetENC2_1: 
NetENC2_2: 
NetENC2_A: 
NetENC2_B: 
NetENC2_C: 
NetP2_8: P2.8 Q2.3 | length 7.8
  Top Layer w0.254: Q2.3 28.375,59.45 33.745,64.82 P2.8
NetQ1_1: Q1.1 R14.1 | length 2.1
  Top Layer w0.254: R14.1 53.268,30 53.5,30.232 Q1.1
NetQ2_1: Q2.1 R16.1 | length 2.6
  Top Layer w0.254: Q2.1 27.5,57.325 R16.1
NetR1_1: R1.1 U1.6 | length 2.7
  Bottom Layer w0.254: U1.6 47.392,58.543 47.492,58.643 R1.1@48.958,58.643
NetR5_2: R5.2 U3.5 | length 1.9
  Bottom Layer w0.254: R5.2@54.55,56.6 U3.5@54.55,58.509
NetR7_2: R7.2 U2.6 | length 2.6
  Bottom Layer w0.254: U2.6 36.049,54.026 36.973,54.026 38.127,55.179 R7.2
NetR17_1: R17.1 U3.1 | length 2.8
  Bottom Layer w0.254: U3.1 54.45,62.154 54.946,62.65 54.946,63.246 R17.1
OLED_BL: MD1.31 R16.2 | length 40
  Top Layer w0.254: R16.2 30.799,54.85 31.953,53.696 31.953,48.031 33.452,46.533 38.659,46.533 40.005,45.187 40.005,27.61 v1(38.964,26.568)
  Bottom Layer w0.4: v1(38.964,26.568) 39.64,27.245 MD1.31
OLED_D/C: MD1.28 P2.5 | length 46.5
  Top Layer w0.254: P2.5@41.315,65 46.825,59.49 46.825,52.875 42.748,48.798 42.748,46.533 44.501,44.78 44.501,37.744 42.697,35.941 42.697,27.551 v1(43.648,26.6)
  Bottom Layer w0.254: MD1.28 43.648,28.552 v1(43.648,26.6)
OLED_RST: MD1.27 P2.4 | length 46
  Top Layer w0.254: P2.4@43.855,65 47.275,61.58 47.275,52.65 43.485,48.86 43.485,46.914 45.212,45.187 45.212,37.567 43.332,35.687 43.332,28.44 v1(45.172,26.6)
  Bottom Layer w0.254: MD1.27 45.043,28.427 45.043,26.729 v1(45.172,26.6)
SCL: MD1.36 R15.1 U2.7 | length 83.8
  Top Layer w0.254: v1(37.121,52.351) 41.526,52.351 42.25,53.075 42.25,54.163 42.937,54.85 43.941,54.85 44.529,54.262 44.529,53.896 v1(44.7,53.725) ; v1(45.6,36.4) 45.797,36.4 46.197,36 51.7,36 v1(52.9,34.8)
  Bottom Layer w0.254: MD1.36 33.3,28.76 33.3,30.3 33.8,30.8 44.2,30.8 44.5,31.1 44.5,35.3 v1(45.6,36.4) ; U2.7 36.066,53.543 37.135,53.543 ; v1@37.121,52.593 v1(37.121,52.351) 37.135,52.364 37.135,53.543 ; R15.1 37.313,53.721 37.135,53.543 ; v1(44.7,53.725) 44.831,53.856 59.644,53.856 61.341,52.159 61.341,35.814 59.602,34.075 53.625,34.075 v1(52.9,34.8)
SDA: MD1.33 R9.1 U2.8 | length 83
  Top Layer w0.254: v1(34.318,51.7) 34.328,51.69 35.77,51.69 36.537,50.923 42.069,50.923 43.2,52.053 v1(43.2,53.55) ; v1(45.6,34.8) v1(51.1,34.8)
  Bottom Layer w0.254: v1@34.318,51.866 v1(34.318,51.7) 34.56,51.7 34.845,51.415 36.043,51.415 ; U2.8 36.045,51.417 36.043,51.415 ; MD1.33 37.1,30 37.5,30.4 45.1,30.4 45.6,30.9 v1(45.6,34.8) ; R9.1 38.329,52.466 38.329,51.765 37.978,51.415 36.043,51.415 ; v1(43.2,53.55) 43.2,53.308 43.616,52.892 43.616,52.794 43.796,52.614 48.514,52.614 49.2,53.3 59.2,53.3 60.706,51.794 60.706,36.457 59.195,34.946 54.954,34.946 53.8,36.1 52.4,36.1 v1(51.1,34.8)
UART_EN: C9.1 MD1.3 PAD11.1 R10.1 | length 14.5
  Bottom Layer w0.254: MD1.3 33.613,46.073 33.613,46.782 34.406,47.574 36.043,47.574 37.247,48.778 R10.1@38.227,48.778 ; R10.1 39.707,48.753 C9.1@39.759,48.7 ; C9.1 40.056,48.575 42.375,48.575 42.725,48.925 44.65,48.925 45.475,49.75 PAD11.1@45.475,50.125
UART_IO0: MD1.25 PAD4.1 | length 18.3
  Bottom Layer w0.254: PAD4.1 37.8,26.3 38.56,25.54 48.73,25.54 49.378,26.187 49.378,28.27 48.895,28.753 47.263,28.753 MD1.25 MD1.25@47.302,28.708
UART_IO2: MD1.24 PAD5.1 | length 4.4
  Bottom Layer w0.254: MD1.24 48.37,31.425 PAD5.1
UART_IO12: MD1.14 PAD7.1 | length 2.7
  Bottom Layer w0.254: MD1.14 49.05,45.75 49.275,45.975 PAD7.1
UART_IO15: MD1.23 PAD8.1 | length 4.4
  Bottom Layer w0.254: MD1.23 48.315,32.75 PAD8.1
UART_RX: MD1.34 PAD1.1 | length 3
  Bottom Layer w0.254: PAD1.1 34.6,26.629 34.944,26.973 34.973,26.973 35.55,27.55 35.55,28.47 MD1.34
UART_TX: MD1.35 PAD2.1 | length 2.9
  Bottom Layer w0.254: PAD2.1 33.1,27.1 33.4,27.4 34.132,27.4 MD1.35@34.516,27.784 ; MD1.35@34.28,28.47 MD1.35
VIB_SIG: MD1.26 R14.2 | length 9.5
  Top Layer w0.254: v1(48.057,26.67) 48.057,29.159 48.92,30.023 50.927,30.023 R14.2
  Bottom Layer w0.254: MD1.26 45.99,27.306 46.626,26.67 v1(48.057,26.67)
VSPI_CLK: MD1.30 P2.7 | length 48.9
  Top Layer w0.254: P2.7@36.235,65 32.205,60.97 32.205,60.759 32.225,60.74 32.225,54.262 32.51,53.977 32.51,48.305 33.723,47.092 38.887,47.092 40.6,45.379 v1(40.6,26.6)
  Bottom Layer w0.254: v1(40.6,26.6) 40.6,26.842 40.895,27.137 40.895,28.735 MD1.30
VSPI_CS: MD1.29 P2.3 PAD6.1 | length 74.8
  Top Layer w0.254: PAD6.1 28,62.875 28.625,63.5 28.625,65.6 29.9,66.875 44.559,66.875 P2.3 ; v1(39.954,62.332) 43.418,58.868 ; v1(42.124,26.6) 42.124,36.231 43.764,37.871 43.764,44.577 42.113,46.228 42.113,48.838 46.375,53.1 46.375,55.911 43.418,58.868 ; 43.375,58.825 43.418,58.868
  Bottom Layer w0.254: v1(39.954,62.332) 43.727,62.332 P2.3@46.395,65 ; v1(42.124,26.6) 42.124,28.694 MD1.29
VSPI_MOSI: MD1.37 P2.6 PAD9.1 | length 73.2
  Top Layer w0.254: PAD9.1 28.3,61.55 29.4,62.65 29.4,65.35 30.325,66.275 37.539,66.275 P2.6 ; P2.6@38.775,65 33.988,60.212 32.775,59 32.775,54.652 33.054,54.373 33.054,48.565 33.943,47.676 39.091,47.676 42.037,44.729 v1(42.037,37.871)
  Bottom Layer w0.254: MD1.37 32.02,29.988 32,30.008 32,30.8 32.7,31.5 43,31.5 43.4,31.9 43.4,36.508 v1(42.037,37.871)
pads on no net: J1.2 J1.3 J1.4 J1.6 J1.7 J1.8 J1.9 J1.10 J1.11 MD1.4 MD1.5 MD1.6 MD1.7 MD1.8 MD1.9 MD1.17 MD1.18 MD1.19 MD1.20 MD1.21 MD1.22 MD1.32 P1.MP1 P1.MP2 U1.1 U1.3 U1.5

## Polygon pours and split planes (outlines as drawn)
GND on Bottom Layer "NONET_L-01_P-001" (solid, remove dead copper, pour order 2): 61.65,67.1 62.075,66.675 62.075,26.6 61.475,26 33.66,26 30,29.244 30,48.05 25.375,52.675 25.375,66.523 25.952,67.1
GND on Top Layer "NONET_L-01_P-001" (solid, remove dead copper, pour order 3): 25.4,54.864 25.4,52.575 35.725,42.25 48,42.25 49.149,41.101 49.149,25.908 49.657,25.4 61.595,25.4 62.103,25.908 62.103,53.467 62.103,54.737 62.103,66.675 61.595,67.183 26.035,67.183 25.4,66.548

## Other copper
Top Layer:
  pour cut-out: 55.626,25.4 57,26.774 57,28.135 59.405,28.135 61.4,30.13 61.4,50.94 56.32,56.02 56.4,56.1 56.4,68.1 61.7,68.1 63.2,66.6 63.2,25.1 55.926,25.1

## Silkscreen, mask and mechanical layers (free items; w line width, h text height)
Top Overlay:
  circle w0.254: c43.8,50.425 r0.127
  circle w0.254: c45.5,50.425 r0.127
  circle w0.254: c49.913,45.975 r0.127
  circle w0.254: c52.65,32.75 r0.127
  circle w0.254: c52.625,31.425 r0.127
  circle w0.254: c36.116,26.3 r0.127
  circle w0.254: c36.5,60.75 r0.25
  circle w0.254: c31.663,26.289 r0.127
  circle w0.254: c33.1,26.3 r0.127
  circle w0.254: c34.6,26.3 r0.127
  rectangle: 56.325,28.85 57.675,29.25
  lines w0.2: 56.325,28.85 57.275,28.85 57.375,28.95 57.575,28.95 57.475,29.05 ; 56.325,28.85 56.525,29.05 57.475,29.05 ; 56.325,28.85 57.675,28.85 57.475,29.05 ; 55.5,32.25 56,32.25 55.5,32.25
  text "UART_Io5" at 28.625,62.65 h0.6
  text "UART_Io23" at 28.65,61.275 h0.6
  text "OLED" at 46.253,61.173 h0.8
  text "UART_EN" at 45.737,45.337 h0.6 r90
  text "UART_3v3" at 44.014,44.886 h0.6 r90
  text "UART_Io12" at 50.175,39.925 h0.6 r90
  text "UART_Io15" at 46.25,32.525 h0.6
  text "UART_Io2" at 46.25,31.125 h0.6
  text "GND" at 32,27.45 h0.6 r90
  text "UART_RX" at 34.85,27.45 h0.6 r90
  text "UART_Io0" at 36.366,27.45 h0.6 r90
  text "UART_TX" at 33.353,27.436 h0.6 r90
Bottom Overlay:
  lines w0.25: 59.677,47.852 59.677,50.038
  lines w0.254: 30.8,25.5 30.8,27 ; 37.05,25.5 37.05,27
  text "MetroBand" at 58.08,50.022 h1.2 r90
  text "JLCJLCJLCJLC" at 60.903,50.015 h0.8 r90
  text "team MOSFETS" at 59.125,49.99 h0.7 r90
  text "VIBRATOR" at 60.582,32.925 h0.8
  text "UART" at 37.538,25.524 h0.5 r270
Board Shape:
  lines w0.05: 29.25,25.75 29.25,46.75 28.5,47.5 25.75,47.5 25.125,47.5 24,48.625 24,50.75 25,51.75 25,66.75 25.75,67.5 61.75,67.5 62.5,66.75 62.5,25.75 61.75,25 30,25 29.25,25.75 ; 29.25,25.75 29.25,25.75
Assembly Notes:
  lines w0.1: 27.136,49.589 27.136,24.589 22.636,24.589 27.153,24.589 ; 27.785,24.589 27.785,67.489 57.485,67.489 57.485,24.589 ; 30,32.5 35,27.5 ; 30,42.5 45,27.5 ; 30,47.648 36.643,41.005 ; 30.082,52.418 41,41.5 ; 33.731,64.989 51.562,64.989 ; 35,52.5 34,53.5 46,41.5 ; 38.989,53.518 40,52.507 40,52.5 55,37.5 ; 39.676,37.999 50,27.675 50,27.648 ; 40,27.5 30,37.5 ; 42.635,24.64 42.635,67.589 ; 44,53.5 45,52.5 ; 44.5,38 55,27.5 ; 48.5,39 55,32.5 ; 49,53.5 50,52.5 ; 52.375,67.589 52.426,67.589 ; 54,53.5 55,52.5 ; 55,42.5 45,52.5 ; 55,47.5 50,52.5 ; 62.5,67.589 62.636,67.589 ; 62.636,79.096 62.636,80.315 ; 30,37.5 30,37.5 ; 45,52.5 45,52.5 ; 50,52.5 50,52.5 ; 55,37.5 55,37.5 ; 29.535,27.089 29.535,54.289 55.735,54.289 55.735,27.089 29.535,27.089
  lines w0.3: 62.535,67.589 22.636,67.589 22.636,24.589 62.636,24.589 62.636,67.589
  text "(36.50,40.50)" at 67.625,69.202 h0.8
  text "(3.50,25.00)" at 0.874,53.835 h0.8
  text "DISPLAY" at 37.684,39.103 h1.52
  text "(28.50,3.00)" at 66.33,15.557 h0.8
Dimensions:
  lines w0.1: 0,9.75 11.5,9.75 13.75,12 ; 0.8,56.55 19.025,56.55 23.775,51.8 25.65,51.8 26.949,50.501 26.949,50.401 27.35,50 ; 12,34.25 13.75,32.5 13.75,12 ; 23.9,10.85 22.75,12 13.75,12 ; 24.5,65.242 24.5,77.5 ; 54.875,24 60.5,18.375 74.9,18.375 ; 61.7,68.1 65.525,71.925 77.325,71.925
  text "PTH1" at 74.45,72.5 h0.8
  text "(34.14,40.09)" at 67.7,70.483 h0.8
  text "PTH3" at 0.925,57.025 h0.8
  text "(1.14,24.59)" at 0.925,55.308 h0.8
  text "PTH2" at 71.75,19.1 h0.8
  text "(26.14,2.59)" at 66.3,16.933 h0.8
  text "Reduce the enclosure" at 0.2,8.35 h0.8
  text "thickness if possible" at 0.2,6.983 h0.8
  text "(for better signal rec.)" at 0.2,5.808 h0.8
Bottom Assembly:
  lines w0.254: 25.5,51.5 25.5,55.25 ; 25.5,57.5 25.5,57.75 ; 25.5,60 25.5,60.25 ; 25.5,62.75 25.5,66.5

## Dimensions
63.25,67.5 to 87.45,63.245 on Top Courtyard
63.15,63.245 to 90.199,55.755 on Top Courtyard
63.15,55.755 to 88.675,47.25 on Top Courtyard
55.45,47.25 to 55.45,42.25 on Top Courtyard
55.45,42.25 to 80.8,25 on Top Courtyard
51.925,51.125 to 51.825,38.25 on Top Courtyard
25.125,47.5 to 25,51.75 on Dimensions
26.136,49.589 to 25,48.25 on Dimensions
22.636,24.589 to 24.9,54.289 on Assembly Notes
22.636,24.589 to 26.339,27.089 on Assembly Notes
22.636,24.589 to 55.735,24.185 on Assembly Notes
22.636,24.589 to 29.535,24.64 on Assembly Notes
22.962,67.589 to 22.636,24.589 on Assembly Notes
62.636,67.589 to 22.636,67.893 on Assembly Notes
62.636,67.893 to 42.636,69.698 on Assembly Notes
27.136,49.589 to 22.636,24.589 on Assembly Notes
26.136,49.589 to 22.636,24.589 on Assembly Notes
51.136,27.589 to 22.636,24.589 on Assembly Notes
51.136,27.589 to 62.636,24.589 on Assembly Notes
58.636,65.089 to 62.636,24.589 on Assembly Notes
59.136,65.089 to 22.636,67.589 on Assembly Notes
25,64.989 to 22.636,67.589 on Assembly Notes
62.5,73.9 to 24.5,77.5 on Dimensions
62.5,66.75 to 63.15,63.245 on Dimensions
25,25 to 25.75,67.5 on Dimensions
63.25,67.5 to 80,64.5 on Dimensions
63.5,56.5 to 63.5,64.5 on Dimensions
72.75,51.5 to 63.5,56.5 on Dimensions
72.75,38 to 72.75,51.5 on Dimensions
63.2,25 to 72.75,38 on Dimensions
59.136,65.089 to 63.25,67.5 on Dimensions
59.136,65.089 to 25,68.25 on Dimensions
51.136,27.589 to 63.2,25 on Dimensions
51.136,27.589 to 25,25 on Dimensions
26.136,49.589 to 25,25 on Dimensions
25,25 to 29.261,25.07 on Dimensions
25,25 to 25.019,47.498 on Dimensions
25,24.75 to 62.5,25.75 on Dimensions

## Text inside footprints (layer, text, board x,y; h text height)
J1: Board Shape "PCB EDGE" at 63.3,66.75 h0.3 r90
P2: Top Overlay "8" at 31.7,65.475 h1.02 r180; Top Overlay "1" at 54.824,64.366 h1.02